# Altium PCB XPCAM_1V1.PCBDOC
Units mil, origin at the board's own origin, x right, y up, seen from the top; angles counter-clockwise.
Board outline 1027.56 x 1106.3 mil, 6 copper layers (Top Layer, Internal Plane 1, Mid-Layer 1, Internal Plane 2, Mid-Layer 2, Bottom Layer); 62 components, 35 nets, 215 pads, 119 vias.
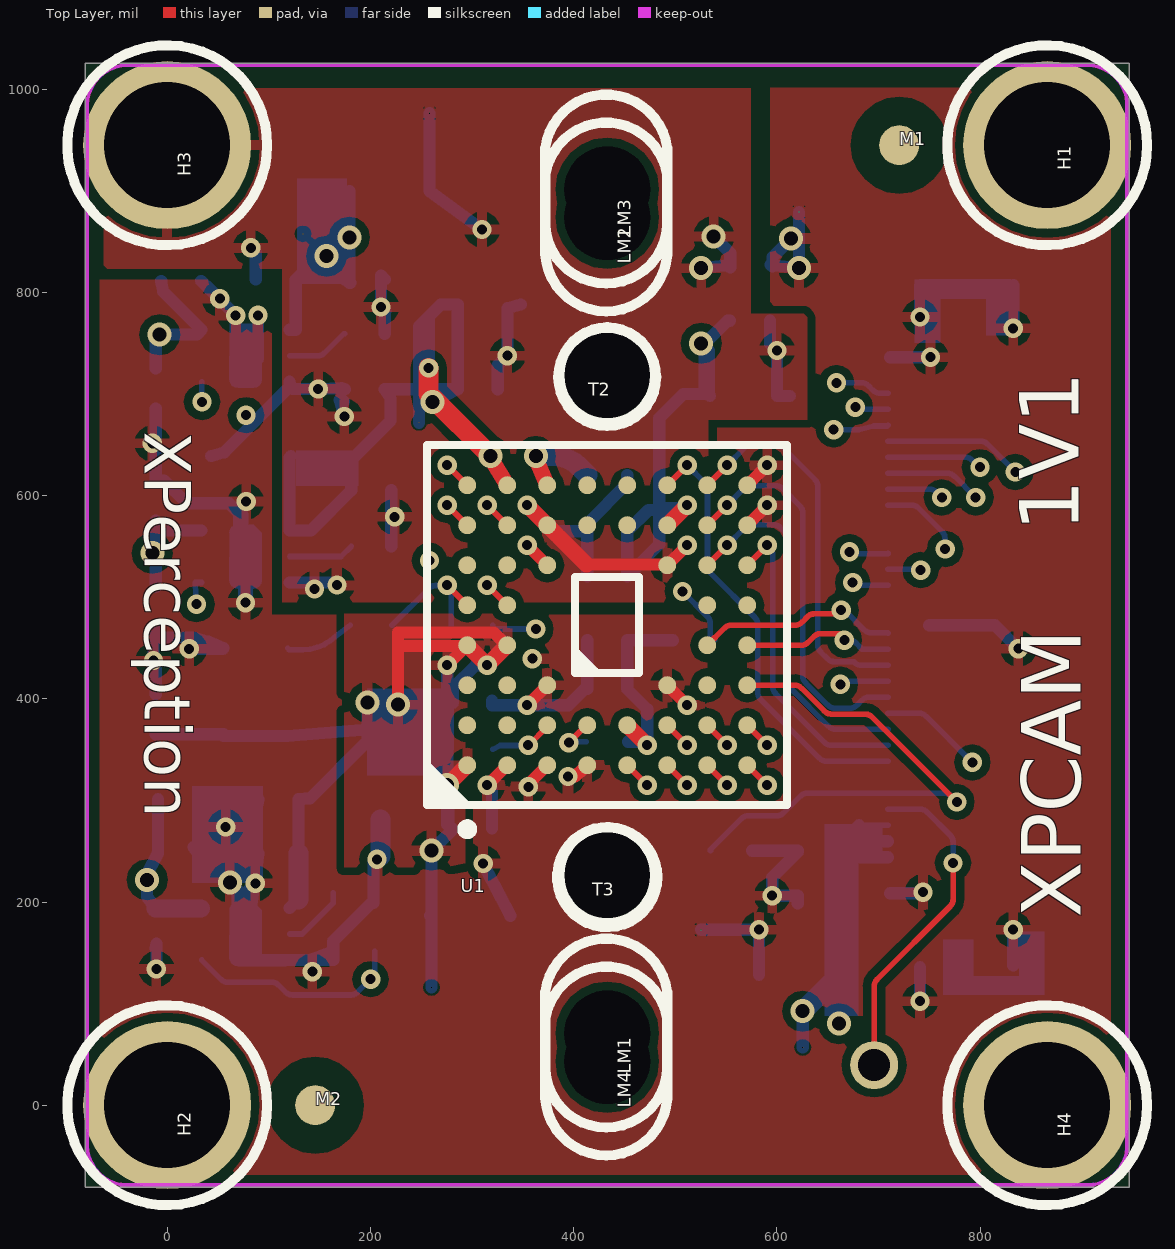
[diagram p0: Top Layer view]
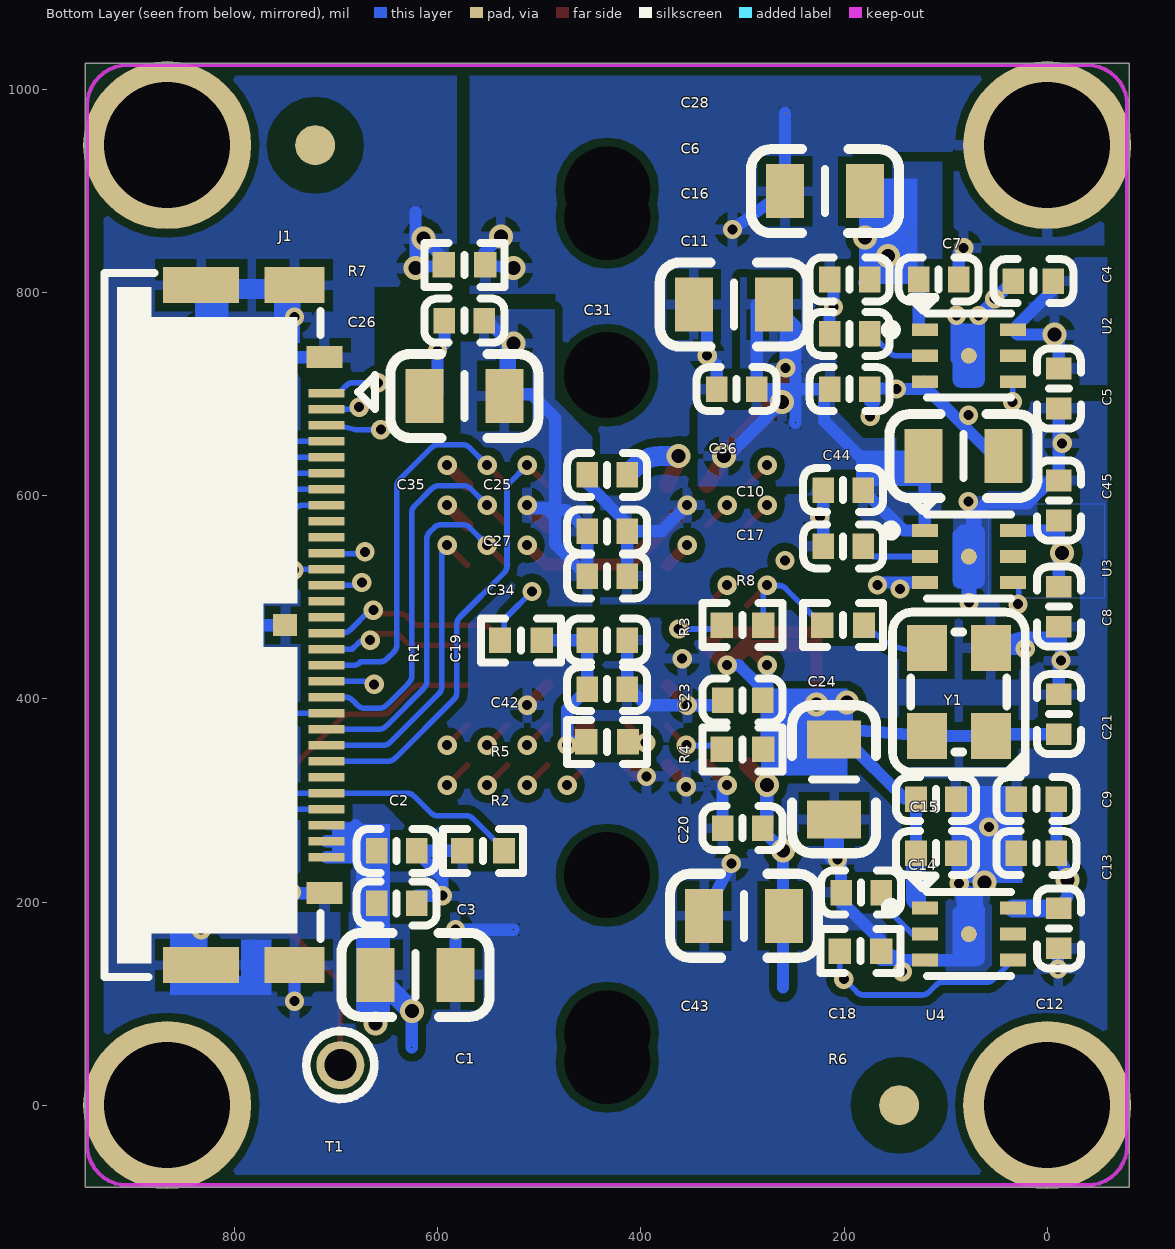
[diagram p1: Bottom Layer view, seen from below]
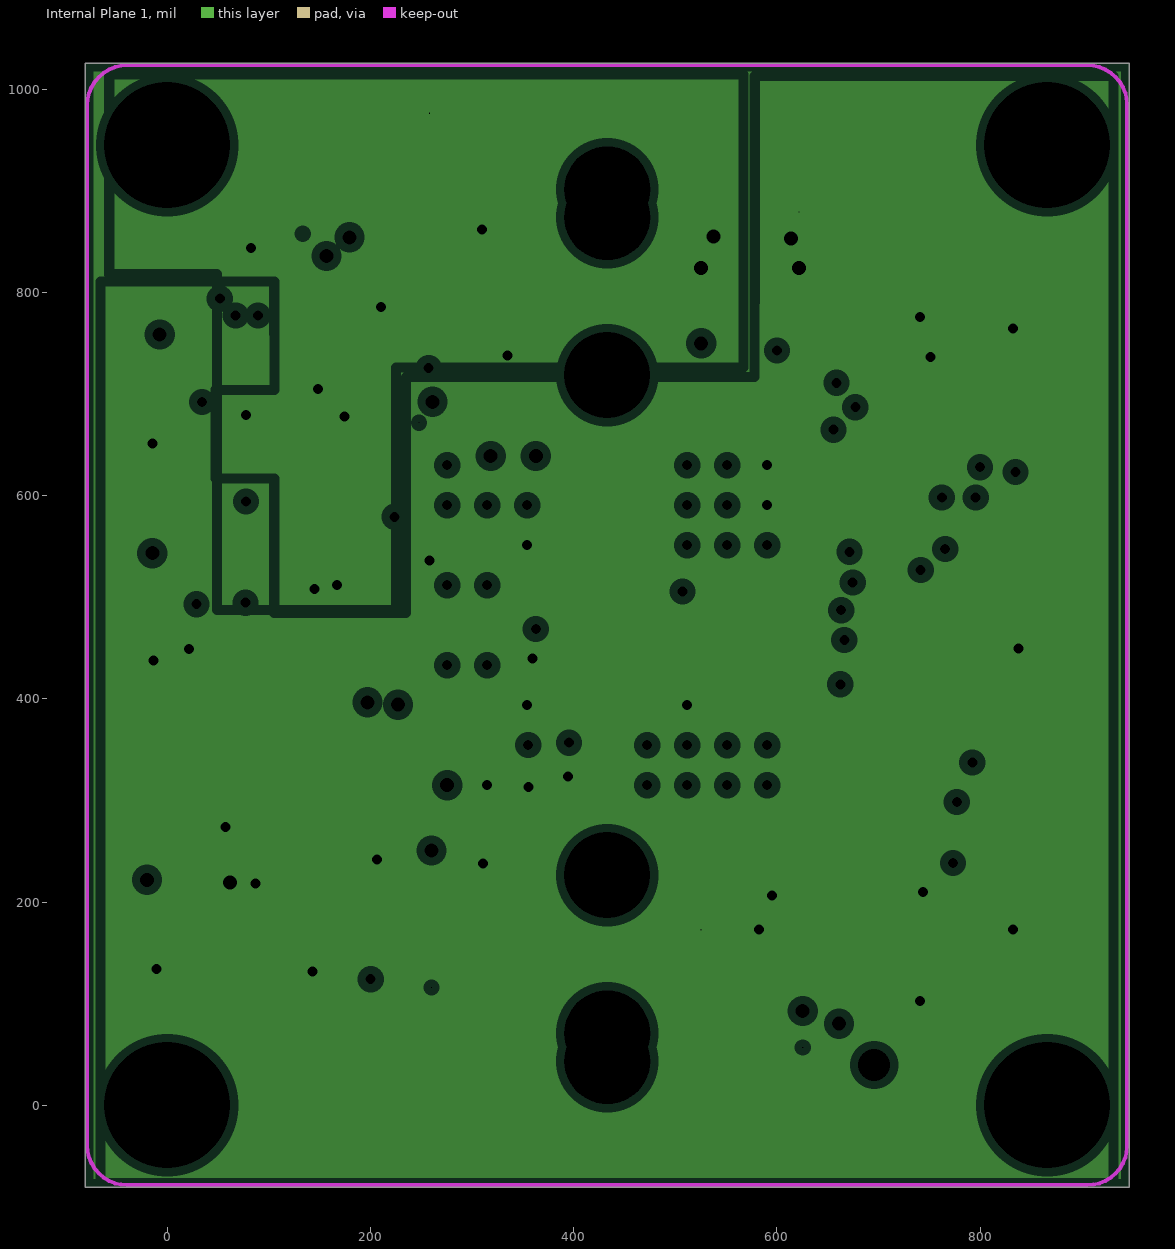
[diagram p2: Internal Plane 1, clearances drawn from the general rule]
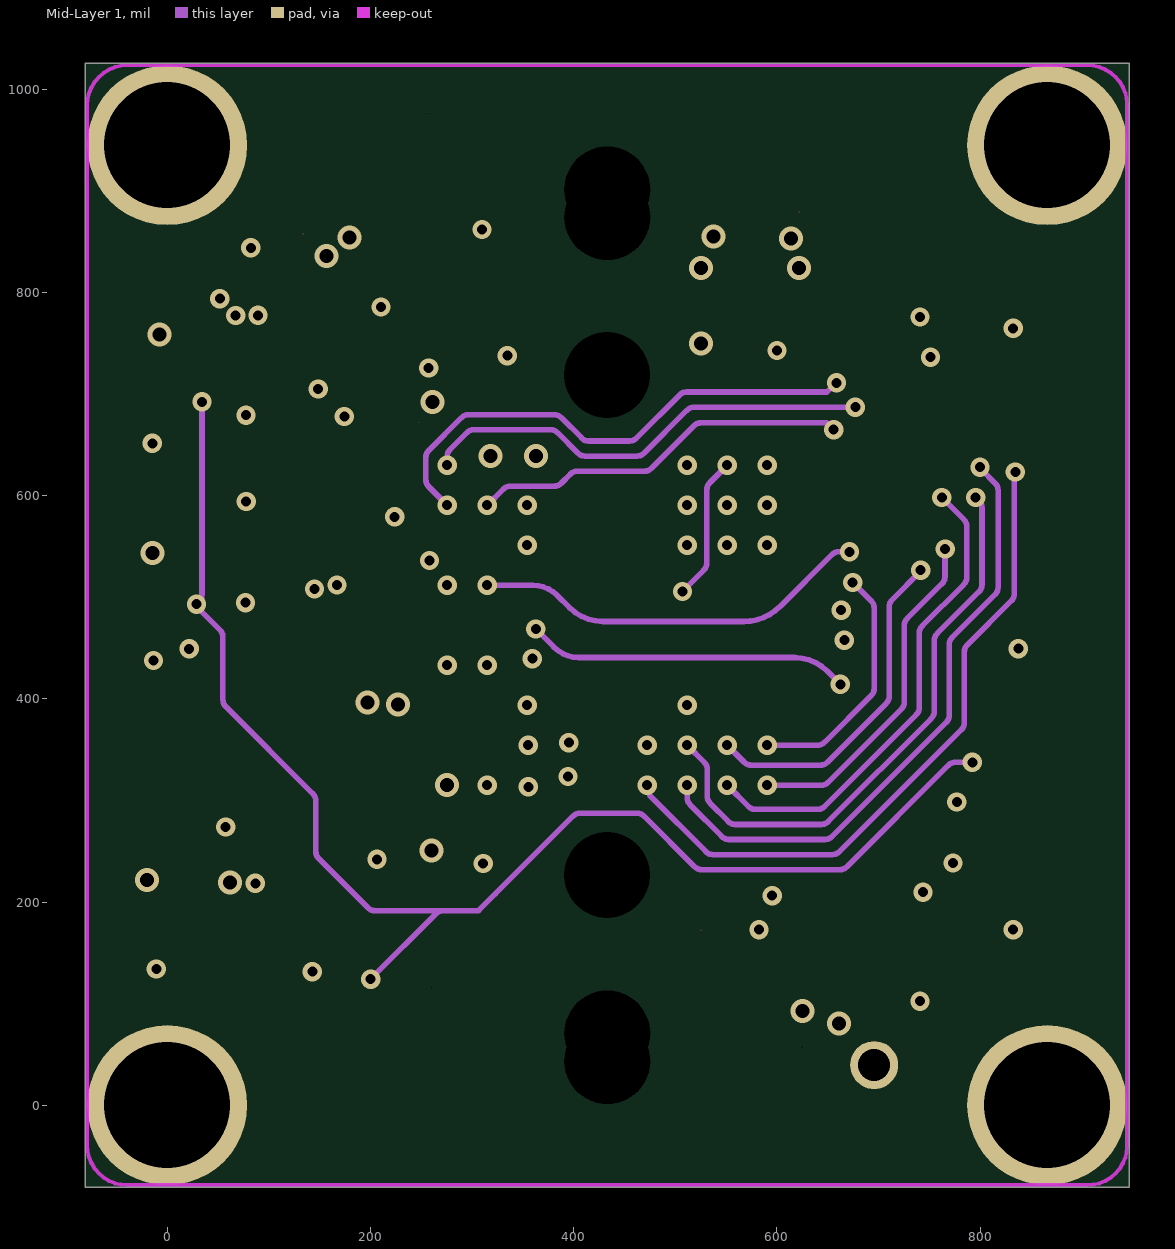
[diagram p3: Mid-Layer 1]
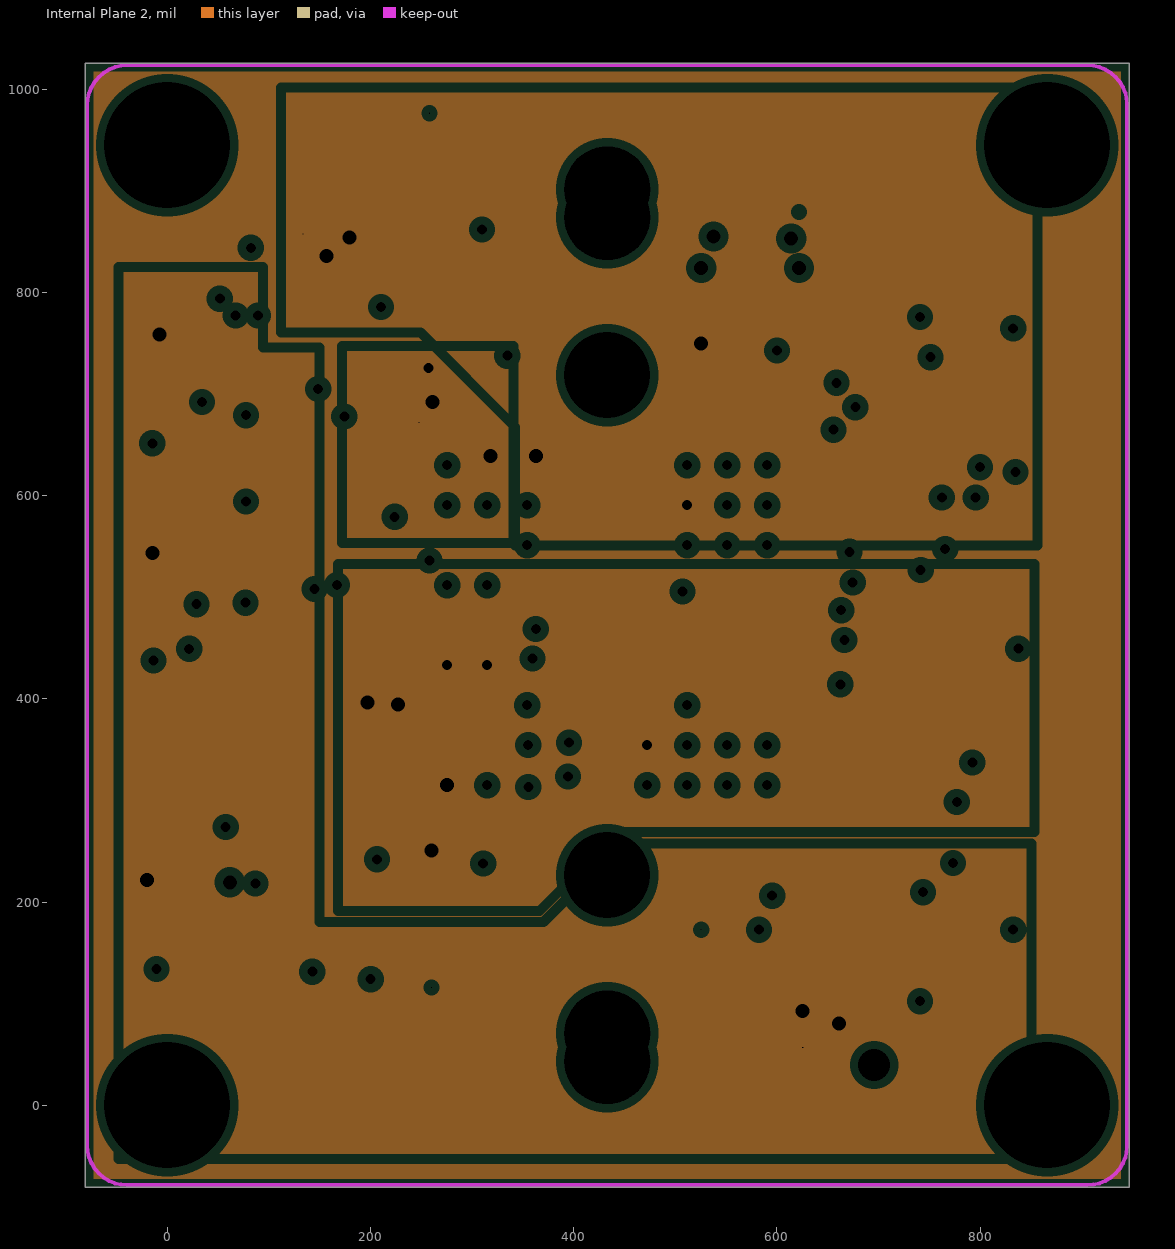
[diagram p4: Internal Plane 2, clearances drawn from the general rule]
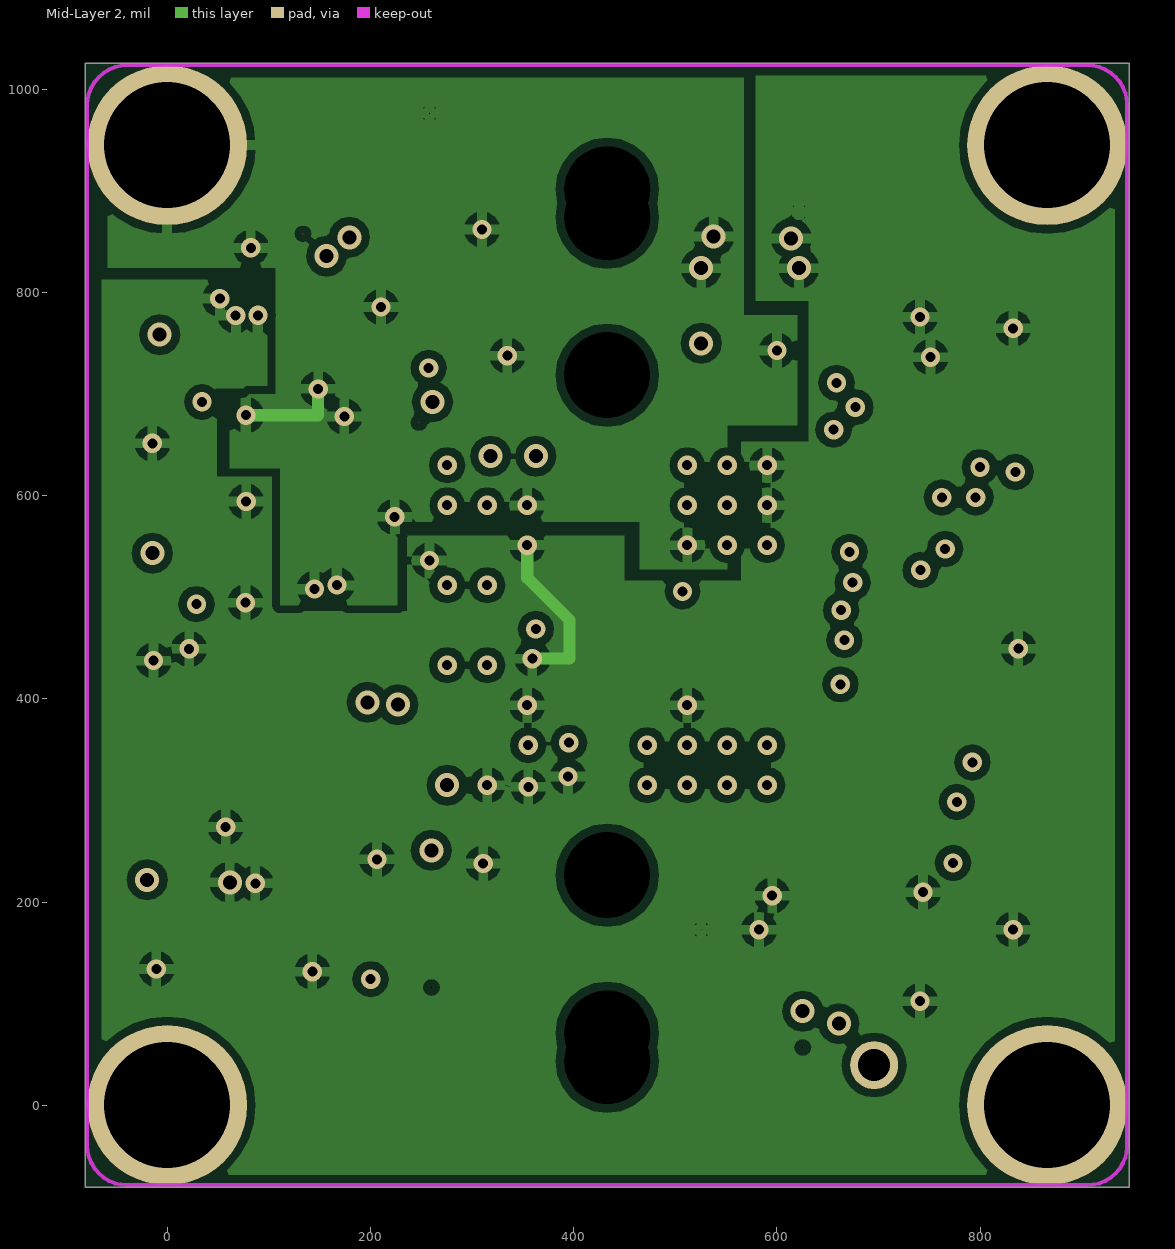
[diagram p5: Mid-Layer 2]

## Layer stack, top to bottom
Top Layer: signal copper 1.4
Dielectric: dielectric 12.6, FR-4, Dk 4.8
Internal Plane 1: plane copper 1.4
Dielectric: dielectric 12.6, FR-4, Dk 4.8
Mid-Layer 1: signal copper 1.4
Dielectric: dielectric 12.6, FR-4, Dk 4.8
Internal Plane 2: plane copper 1.4
Dielectric: dielectric 12.6, FR-4, Dk 4.8
Mid-Layer 2: signal copper 1.4
Dielectric: dielectric 12.6, FR-4, Dk 4.8
Bottom Layer: signal copper 1.4

## Board outline
-80.71,-80.71 946.85,-80.71 946.85,1025.59 -80.71,1025.59

## Design rules (kind name [scope] priority, off if disabled: settings)
Clearance "'Default' PADS rule_9" [All] p1: gap=8
Clearance "'Default' PADS rule_8" [InPolygon vs InPolygon] p2: gap=8
Clearance "'Default' PADS rule_7" [All] p3: gap=5.5
Clearance "'Default' PADS rule_4" [IsVia vs IsVia] p4: gap=6
ComponentClearance "'Default' PADS rule" [All] p1: gap=10 collisioncheckmode=3 verticalgap=10 showdistances=FALSE
PlaneClearance "'Default' PADS rule_3" [All] p1: clearance=8
PlaneConnect "Power Plane Connect Style - pads with no thermal" [(Name='J1-31') Or (Name='J1-32') Or (Name='LM1-1') Or (Name='LM2-1') Or (Name='LM3-1') Or (Name='LM4-1') Or (Name='M1-1') Or (Name='M2-1') Or (Name='T2-1') Or (Name='T3-1')] p1: planeconnectstyle=NoConnect reliefexpansion=20 reliefentries=4 reliefconductorwidth=10 reliefairgap=10 // PAD - No Thermal Connect Rule
PlaneConnect "Power Plane Connect Style - from global settings" [All] p2: planeconnectstyle=Relief reliefexpansion=20 reliefentries=2 reliefconductorwidth=11.81 reliefairgap=10
PolygonConnect [All] p1: connectstyle=Relief reliefconductorwidth=10 reliefentries=4 polygonreliefangle="90 Angle"
RoutingVias [All] p1: holewidth=28 width=50 viastyle="Through Hole" minholewidth=28 minwidth=50 maxholewidth=28 maxwidth=50
SMDToCorner "'Default' PADS rule_5" [All] p1: distance=60000
SMDToPlane "'Default' PADS rule_6" [All] p1: distance=60000
SilkscreenOverComponentPads [All] p1: minsilkscreentomaskgap=10
SolderMaskExpansion [All] p1: expansion=4
Width "'Default' PADS rule_2" [All] p1: maxlimit=250 minlimit=5 preferedwidth=5.6
24 further rules are at their usual default settings.

## Components (designator, comment, footprint, x,y, rotation, side; value= is the part's Value field where it differs from the comment)
C1 "0805C" 0805C 621.77,128.34 r0 bottom
C2 "0402C_L" 0402C_L 640.27,250.44 r0 bottom
C3 "0402C_L" 0402C_L 640.27,198.64 r0 bottom
C4 "0402C_L" 0402C_L 13.76,811.13 r180 bottom
C5 "0402C_L" 0402C_L -11.39,705.49 r90 bottom
C6 "0402C_L" 0402C_L 194.49,812.75 r0 bottom
C7 "0402C_L" 0402C_L 106.83,812.75 r0 bottom
C8 "0402C_L" 0402C_L -11.39,490.66 r90 bottom
C9 "0402C_L" 0402C_L 10.7,301.18 r180 bottom
C10 "0402C_L" 0402C_L 200.79,605.35 r0 bottom
C11 "0402C_L" 0402C_L 194.49,704.72 r0 bottom
C12 "0402C_L" 0402C_L -11.39,174.01 r90 bottom
C13 "0402C_L" 0402C_L 10.7,248.03 r180 bottom
C14 "0402C_L" 0402C_L 109.51,248.03 r180 bottom
C15 "0402C_L" 0402C_L 109.51,301.18 r0 bottom
C16 "0402C_L" 0402C_L 194.49,759.28 r180 bottom
C17 "0402C_L" 0402C_L 200.79,550.11 r180 bottom
C18 "0402C_L" 0402C_L 183.18,209.32 r180 bottom
C19 "0402C_L" 0402C_L 433.07,457.64 r0 bottom
C20 "0402C_L" 0402C_L 299.87,272.64 r180 bottom
C21 "0402C_L" 0402C_L -11.39,384.92 r270 bottom
C23 "0402C_L" 0402C_L 299.87,398.44 r180 bottom
C24 "0805C" 0805C 209.76,320.84 r90 bottom
C25 "0402C_L" 0402C_L 433.07,620.44 r180 bottom
C26 "0402C_L" 0402C_L 573.67,772.14 r180 bottom
C27 "0402C_L" 0402C_L 433.07,564.94 r0 bottom
C28 "0805C" 0805C 218.7,899.71 r180 bottom
C31 "0805C" 0805C 308.54,788.07 r180 bottom
C34 "0402C_L" 0402C_L 433.07,520.54 r0 bottom
C35 "0805C" 0805C 573.67,698.14 r180 bottom
C36 "0402C_L" 0402C_L 305.65,704.72 r180 bottom
C42 "0402C_L" 0402C_L 433.07,409.54 r0 bottom
C43 "0805C" 0805C 298.3,186.46 r180 bottom
C44 "0805C" 0805C 82.38,638.88 r0 bottom
C45 "0402C_L" 0402C_L -11.39,595.26 r90 bottom
H1 "PAD_M3_D350_450" PAD_M3_D350_450 866.14,944.88 r90 top
H2 "PAD_M3_D350_450" PAD_M3_D350_450 0,0 r90 top
H3 "PAD_M3_D350_450" PAD_M3_D350_450 0,944.88 r90 top
H4 "PAD_M3_D350_450" PAD_M3_D350_450 866.14,0 r90 top
J1 "HSA30_P40L196W42H10_20525" HSA30_P40L196W42H10_20525 767.72,472.44 r270 bottom
LM1 "PAD_M3_D350_450A" PAD_M3_D350_450A 433.07,70.87 r90 top
LM2 "PAD_M3_D350_450A" PAD_M3_D350_450A 433.07,874.02 r90 top
LM3 "PAD_M3_D350_450A" PAD_M3_D350_450A 433.07,901.57 r90 top
LM4 "PAD_M3_D350_450A" PAD_M3_D350_450A 433.07,43.31 r90 top
M1 "PAD_MARK_D1-2" PAD_MARK_D1-2 720.47,944.88 r0 top
M2 "PAD_MARK_D1-2" PAD_MARK_D1-2 145.67,0 r0 top
R1 "0402R_L" 0402R_L 518.17,457.64 r180 bottom
R2 "0402R_L" 0402R_L 555.17,250.44 r0 bottom
R3 "0402R_L" 0402R_L 299.87,472.44 r0 bottom
R4 "0402R_L" 0402R_L 299.87,350.34 r180 bottom
R5 "0402R_L" 0402R_L 433.07,357.74 r0 bottom
R6 "0402R_L" 0402R_L 183.85,151.69 r0 bottom
R7 "0402R_L" 0402R_L 573.44,827.17 r180 bottom
R8 "0402R_L" 0402R_L 200.79,472.44 r180 bottom
T1 "PAD_TP_D1.2" PAD_TP_D1.2 695.77,39.54 r270 bottom
T2 "PAD_D2-D1.2" PAD_D2-D1.2 433.07,718.5 r270 top
T3 "PAD_D2-D1.2" PAD_D2-D1.2 433.07,226.38 r270 top
U1 "IBGA52_8X8_P100L90W90H90R" IBGA52_8X8_P100L90W90H90R 433.07,472.44 r90 top
U2 "SON6_P65L21W21H8_DRV" SON6_P65L21W21H8_DRV 77.18,737.7 r180 bottom
U3 "SON6_P65L21W21H8_DRV" SON6_P65L21W21H8_DRV 77.18,540.07 r180 bottom
U4 "SON6_P65L21W21H8_DRV" SON6_P65L21W21H8_DRV 77.18,168.51 r180 bottom
Y1 "XTAL_3225" XTAL_3225 87,406.59 r90 bottom

## Footprints (in the part's own frame and the unit in brackets; to place one, negate y for a bottom-side part, rotate by r counter-clockwise, add the part's x,y. Pads: shape width x height; smd on the part's side, far side on the other; paste and mask are expansions set on the pad)
0402C_L [mm]
  rect 0.54x0.64 smd: 1(-0.5,0) 2(0.5,0)
  silkscreen extent -1,-0.55 1,0.55
0402R_L [mm]
  rect 0.56x0.64 smd: 1(-0.52,0) 2(0.52,0)
  silkscreen extent -1,-0.55 1,0.55
0805C [mm]
  rect 0.95x1.35 smd: 1(-1,0) 2(1,0)
  silkscreen extent -1.85,-1.05 1.85,1.05
HSA30_P40L196W42H10_20525 [mm]
  rect 0.21x0.9 smd: 1(-5.8,1.48) 2(-5.4,1.48) 3(-5,1.48) 4(-4.6,1.48) 5(-4.2,1.48) 6(-3.8,1.48) 7(-3.4,1.48) 8(-3,1.48) 9(-2.6,1.48) 10(-2.2,1.48) 11(-1.8,1.48) 12(-1.4,1.48) 13(-1,1.48) 14(-0.6,1.48) 15(-0.2,1.48) 16(0.2,1.48) 17(0.6,1.48) 18(1,1.48) 19(1.4,1.48) 20(1.8,1.48) 21(2.2,1.48) 22(2.6,1.48) 23(3,1.48) 24(3.4,1.48) 25(3.8,1.48) 26(4.2,1.48) 27(4.6,1.48) 28(5,1.48) 29(5.4,1.48) 30(5.8,1.48)
  round 0 all layers, no hole: 31(-7.45,0) 32(7.45,0)
  rect 0.9x1.5 smd: 33(-8.5,0.68) 34(8.5,0.68)
  rect 0.9x1.9 smd: 35(8.5,-1.65) 36(-8.5,-1.65)
  rect 0.55x0.9 smd: 37(-6.7,1.43) 38(6.7,1.43)
  rect 0.55x0.6 smd: 39(0,0.45)
  silkscreen extent -8.8,-4.07 8.8,2.7
IBGA52_8X8_P100L90W90H90R [mm]
  round 0.45 smd: A1(-3.5,3.5) A2(-2.5,3.5) A3(-1.5,3.5) A4(-0.5,3.5) A5(0.5,3.5) A6(1.5,3.5) A7(2.5,3.5) A8(3.5,3.5) B1(-3.5,2.5) B2(-2.5,2.5) B3(-1.5,2.5) B4(-0.5,2.5) B5(0.5,2.5) B6(1.5,2.5) B7(2.5,2.5) B8(3.5,2.5) C1(-3.5,1.5) C2(-2.5,1.5) C3(-1.5,1.5) C6(1.5,1.5) C7(2.5,1.5) C8(3.5,1.5) D1(-3.5,0.5) D2(-2.5,0.5) D7(2.5,0.5) D8(3.5,0.5) E1(-3.5,-0.5) E2(-2.5,-0.5) E7(2.5,-0.5) E8(3.5,-0.5) F1(-3.5,-1.5) F2(-2.5,-1.5) F3(-1.5,-1.5) F6(1.5,-1.5) F7(2.5,-1.5) F8(3.5,-1.5) G1(-3.5,-2.5) G2(-2.5,-2.5) G3(-1.5,-2.5) G4(-0.5,-2.5) G5(0.5,-2.5) G6(1.5,-2.5) G7(2.5,-2.5) G8(3.5,-2.5) H1(-3.5,-3.5) H2(-2.5,-3.5) H3(-1.5,-3.5) H4(-0.5,-3.5) H5(0.5,-3.5) H6(1.5,-3.5) H7(2.5,-3.5) H8(3.5,-3.5)
  silkscreen extent -5.22,-4.5 4.5,4.5
PAD_D2-D1.2 [mm]
  round 2.1 hole 2.15 unplated: 1(0,0)
  silkscreen extent -1.2,-1.2 1.2,1.2
PAD_M3_D350_450 [mm]
  round 4.2 / inner round 4 / far side round 4.2 hole 3.15: 1(0,0)
  silkscreen extent -2.5,-2.5 2.5,2.5
PAD_M3_D350_450A [mm]
  round 2.1 hole 2.15 unplated: 1(0,0)
  silkscreen extent -2.35,-1.5 2.36,1.55
PAD_MARK_D1-2 [mm]
  round 1 / inner round 0 / far side round 1 all layers, no hole mask+0.5: 1(0,0)
  Top Layer pour cut-out: 1.21,0 1.169,0.313 1.048,0.605 0.856,0.856 0.605,1.048 0.313,1.169 0,1.21 -0.313,1.169 -0.605,1.048 -0.856,0.856 -1.048,0.605 -1.169,0.313 -1.21,0 -1.169,-0.313 -1.048,-0.605 -0.856,-0.856 -0.605,-1.048 -0.313,-1.169 0,-1.21 0.313,-1.169 0.605,-1.048 0.856,-0.856 1.048,-0.605 1.169,-0.313 1.21,0
  Top Layer pour cut-out: 1.009,0 0.974,0.261 0.873,0.504 0.713,0.713 0.504,0.873 0.261,0.974 0,1.009 -0.261,0.974 -0.504,0.873 -0.713,0.713 -0.873,0.504 -0.974,0.261 -1.009,0 -0.974,-0.261 -0.873,-0.504 -0.713,-0.713 -0.504,-0.873 -0.261,-0.974 0,-1.009 0.261,-0.974 0.504,-0.873 0.713,-0.713 0.873,-0.504 0.974,-0.261 1.009,0
  Bottom Layer pour cut-out: 1.21,0 1.169,0.313 1.048,0.605 0.856,0.856 0.605,1.048 0.313,1.169 0,1.21 -0.313,1.169 -0.605,1.048 -0.856,0.856 -1.048,0.605 -1.169,0.313 -1.21,0 -1.169,-0.313 -1.048,-0.605 -0.856,-0.856 -0.605,-1.048 -0.313,-1.169 0,-1.21 0.313,-1.169 0.605,-1.048 0.856,-0.856 1.048,-0.605 1.169,-0.313 1.21,0
  Bottom Layer pour cut-out: 1.009,0 0.974,0.261 0.873,0.504 0.713,0.713 0.504,0.873 0.261,0.974 0,1.009 -0.261,0.974 -0.504,0.873 -0.713,0.713 -0.873,0.504 -0.974,0.261 -1.009,0 -0.974,-0.261 -0.873,-0.504 -0.713,-0.713 -0.504,-0.873 -0.261,-0.974 0,-1.009 0.261,-0.974 0.504,-0.873 0.713,-0.713 0.873,-0.504 0.974,-0.261 1.009,0
PAD_TP_D1.2 [mm]
  round 1.2 hole 0.8: 1(0,0)
  silkscreen extent -0.85,-0.85 0.85,0.85
SON6_P65L21W21H8_DRV [mm]
  rect 0.65x0.32 smd: 1(-1.1,0.65) 2(-1.1,0) 3(-1.1,-0.65) 4(1.1,-0.65) 5(1.1,0) 6(1.1,0.65)
  round 0.4 smd: 7(0,0)
  Top Layer region: -0.4,0.6 -0.2,0.8 0.2,0.804 0.278,0.788 0.344,0.744 0.388,0.678 0.404,0.6 0.4,0.6 0.404,-0.6 0.388,-0.678 0.344,-0.744 0.278,-0.788 0.2,-0.804 0.2,-0.8 -0.2,-0.804 -0.278,-0.788 -0.344,-0.744 -0.388,-0.678 -0.404,-0.6 -0.4,-0.6 -0.4,0.6
  silkscreen extent -2.08,-1.05 1.05,1.45
XTAL_3225 [mm]
  rect 1.15x1 smd: 1(-1.1,-0.8) 2(1.1,-0.8) 3(1.1,0.8) 4(-1.1,0.8)
  silkscreen extent -2,-1.66 2,1.66

## Via types
v1: diameter 19, hole 9.84, Top Layer to Bottom Layer, 92 vias
v2: diameter 23.62, hole 13.78, Top Layer to Bottom Layer, 20 vias
v3: diameter 0, hole 0, Top Layer to Bottom Layer, 7 vias

## Nets (pads, with @x,y where several pads share a name; then routed paths per layer and width w, separated by ;. In a path a pad name is that pad's centre, name@x,y a point inside that pad or via, vN(x,y) a via of type N, cw(c..) or ccw(c..) an arc to the next point about the centre after c; other vN are vias at no path point)
5V0: C1.2 C2.2 C3.2 C4.2 C5.2 C8.2 C9.2 C12.2 C13.2 C45.1 J1.28 J1.29 J1.30 U2.6 U3.6 U4.6 | length 837.7
  Bottom Layer w5.5: C1.2@659.96,127.16 C1.2 C1.2@661.14,132.04 ; C2.2@659.96,246.74 C2.2 ; 680.97,275.59 J1.28
  Bottom Layer w12: C12.2 -19.85,205.1 v2(-19.85,221.89) -18.57,230.45 C13.2 C9.2 ; C8.2 C45.1@-11.39,565.66 ; C45.1 C45.1@-11.39,565.66 ; C5.2 -11.39,754.47 v2(-7.37,758.5) 29.22,758.5 U2.6 33.69,763.29 -3.92,800.9 C4.2 ; U4.6@33.46,193.69 U4.6 ; U3.6 C45.1@-11.39,565.66 ; v3(625.47,56.89) v2(625.47,92.67) ; C1.2@659.96,133.23 C1.2@661.14,132.04 ; C2.2@659.96,246.74 662.6,244.09 J1.30 ; 680.97,275.59 659.96,254.58 C2.2 669.36,259.84 J1.29
  Bottom Layer w17.72: C12.2 U4.6@33.46,193.69
  Bottom Layer w20: v2(625.47,92.67) C1.2@659.96,127.16 ; C1.2@659.96,133.23 C3.2 659.96,246.74 C2.2 ; v2(661.14,80.24) C1.2
  other v2: -14.65,543.39
ADDR_CTL: J1.20 U1.G7 | length 385
  Top Layer w6: U1.G7 v1(551.18,590.55)
  Bottom Layer w5.5: v1(551.18,590.55) 567.46,606.83 cw(c574.27,600.03) 574.27,609.65 598.97,609.65 cw(c598.97,600.03) 605.78,606.83 622.65,589.96 cw(c615.85,583.15) 625.47,583.15 625.47,422.57 ccw(c635.1,422.57) 628.29,415.77 650.51,393.55 ccw(c657.31,400.36) 657.31,390.73 671.84,390.73 ccw(c671.84,400.36) 678.65,393.55 683.85,398.76 cw(c690.66,391.95) 690.66,401.57 J1.20
AGND: C6.2 C7.1 C10.2 C11.1 C16.1 C17.1 C25.1 C26.1 C27.1 C28.1 C31.1 C34.1 C35.1 C36.1 C44.1 R7.2 U1.C7 U1.F6 U2.3 U3.3 | length 1286.2
  Top Layer w12: 412.57,532.31 491.31,532.31 U1.F6 v1(511.81,551.18)
  Top Layer w15.75: v1(354.33,590.55) U1.C7 412.57,532.31
  Mid-Layer 2 w12: v1(77.59,679.15) 148.52,679.15 v1(148.52,705.06)
  Bottom Layer w5.5: C27.1@407.17,564.94 C27.1
  Bottom Layer w12: C44.1 56.04,642.76 U2.3@121.1,707.82 ; v1(82.23,843.91) 87.14,839 C7.1 ; U2.3 U2.3@121.1,707.82 ; v1(144.85,508.09) 142.3,511.72 142.3,512.05 139.87,514.48 U3.3 164.46,514.48 v1(167.1,511.96) ; C11.1@174.13,692.75 169.76,693.99 v1(174.28,677.82) ; C11.1 171.75,705.74 v1(148.52,705.06) 123.17,705.06 U2.3@121.1,707.82 ; C16.1 214.18,780.6 214.94,781.36 v1(210.35,785.66) 210.35,816.54 C6.2 ; C17.1 v1@220.47,579.19 ; C10.2 v1@220.47,579.19 ; v1(223.81,579.19) v1@220.47,579.19 ; v3(258.07,976.39) C28.1 v1(309.82,861.92) ; C36.1 325.34,728.37 v1(334.76,737.8) 334.76,784.51 C31.1 ; v1(354.33,590.55) 379.94,564.94 C27.1@407.17,564.94 ; C34.1 C27.1 413.39,572.35 452.76,612.11 C25.1 ; v2(525.57,823.94) R7.2 554.07,824.82 554.07,838.74 v2(537.76,855.05) ; C26.1 593.36,749.51 v1(600.06,742.8) 600.06,698.14 C35.1
CAM_SCL: J1.17 U1.H4 | length 152.3
  Top Layer w5.5: U1.H4 624,452.76 ccw(c624,462.38) 630.8,455.58 636.67,461.44 cw(c643.47,454.63) 643.47,464.26 666.4,464.26 v1(666.4,457.81)
  Bottom Layer w5.5: v1(666.4,457.81) 671.12,457.81 cw(c671.12,448.19) 677.93,455 684.11,448.82 J1.17
CAM_SDA: J1.16 U1.G4 | length 202.2
  Top Layer w5.5: U1.G4 548.36,469.62 cw(c555.17,462.82) 555.17,472.44 617.78,472.44 ccw(c617.78,482.07) 624.59,475.26 630.12,480.79 cw(c636.93,473.99) 636.93,483.61 663.3,483.61 v1(663.3,487.3)
  Bottom Layer w5.5: v1(663.3,487.3) 666.58,487.3 686.02,467.86 ccw(c692.83,474.67) 692.83,465.04 708.97,465.04 J1.16
CAMPWR_EN: J1.21 R6.2 U2.4 U3.4 U4.4 | length 1872.3
  Mid-Layer 1 w5.5: v1(34.26,692.27) 34.26,502.66 ; v1(200.18,124.11) 264.8,188.73 ; v1(792.37,337.45) 792.37,337.73 775.94,337.73 ccw(c775.94,328.1) 769.14,334.91 668.99,234.76 cw(c662.18,241.57) 662.18,231.94 525.86,231.94 cw(c525.86,241.57) 519.05,234.76 469.31,284.5 ccw(c462.5,277.7) 462.5,287.32 406.13,287.32 ccw(c406.13,277.7) 399.32,284.5 322.6,207.79 306.37,191.55 ; v1@31.44,495.85 ccw(c24.63,502.66) 34.26,502.66 ; v1@31.44,495.85 ccw(c24.63,502.66) 34.26,502.66 ; v1@31.44,495.85 ccw(c24.63,502.66) 34.26,502.66 ; v1@31.44,495.85 ccw(c24.63,502.66) 34.26,502.66 ; v1@31.44,495.85 v1(28.73,493.15) 28.73,490.88 52.01,467.6 ; 52.01,467.6 cw(c45.21,460.79) 54.83,460.79 ; 52.01,467.6 cw(c45.21,460.79) 54.83,460.79 ; 52.01,467.6 cw(c45.21,460.79) 54.83,460.79 ; 54.83,399 ccw(c64.46,399) 57.65,392.19 ; 54.83,399 ccw(c64.46,399) 57.65,392.19 ; 54.83,399 ccw(c64.46,399) 57.65,392.19 ; 54.83,399 54.83,460.79 ; 57.65,392.19 143.51,306.33 ; 143.51,306.33 cw(c136.71,299.52) 146.33,299.52 ; 143.51,306.33 cw(c136.71,299.52) 146.33,299.52 ; 143.51,306.33 cw(c136.71,299.52) 146.33,299.52 ; 146.33,249.56 ccw(c155.96,249.56) 149.15,242.76 ; 146.33,249.56 ccw(c155.96,249.56) 149.15,242.76 ; 146.33,249.56 ccw(c155.96,249.56) 149.15,242.76 ; 146.33,249.56 146.33,299.52 ; 149.15,242.76 197.54,194.37 ; 197.54,194.37 ccw(c204.35,201.18) 204.35,191.55 ; 197.54,194.37 ccw(c204.35,201.18) 204.35,191.55 ; 197.54,194.37 ccw(c204.35,201.18) 204.35,191.55 ; 204.35,191.55 306.37,191.55 ; 264.8,188.73 cw(c271.61,181.93) 271.61,191.55 ; 264.8,188.73 cw(c271.61,181.93) 271.61,191.55 ; 271.61,191.55 306.37,191.55
  Bottom Layer w5.5: v1(28.73,493.15) 27.6,513.81 27.6,514.52 27.64,514.48 U3.4 ; U4.4 52.93,123.86 ccw(c59.74,130.67) 59.74,121.04 102.81,121.04 cw(c102.81,111.42) 109.62,118.22 116.49,111.35 ccw(c123.3,118.15) 123.3,108.53 180.61,108.53 ccw(c180.61,118.15) 187.42,111.35 v1(200.18,124.11) 201.5,125.43 ccw(c194.69,132.24) 204.32,132.24 R6.2 ; U2.4 33.87,692.65 v1(34.26,692.27) ; J1.21 740,385.83 cw(c740,376.2) 746.81,383.01 v1(792.37,337.45)
CLK2: R8.2 Y1.3 | length 69.6
  Bottom Layer w5.5: Y1.3 120.05,448.35 133.53,448.35 ccw(c133.53,494.19) 165.95,461.77 R8.2
CMOS_D0: J1.1 U1.A7 | length 593.3
  Top Layer w6: v1(275.59,590.55) U1.A7
  Mid-Layer 1 w5.5: v1(275.59,590.55) 257.4,608.74 cw(c264.21,615.55) 254.58,615.55 254.58,637.76 cw(c264.21,637.76) 257.4,644.57 289.65,676.82 cw(c296.46,670.02) 296.46,679.64 380.98,679.64 cw(c380.98,670.02) 387.79,676.82 408.05,656.56 ccw(c414.86,663.37) 414.86,653.74 454.98,653.74 ccw(c454.98,663.37) 461.79,656.56 504.45,699.22 cw(c511.26,692.41) 511.26,702.04 649.21,702.04 658.27,711.09 v1(658.67,711.09)
  Bottom Layer w5.5: v1(658.67,711.09) 683.33,711.09 cw(c683.33,701.47) 690.14,708.28 694.8,703.61 ccw(c701.61,710.41) 701.61,700.79 J1.1
CMOS_D1: J1.2 U1.A8 | length 512.6
  Top Layer w6: v1(275.59,629.92) U1.A8
  Mid-Layer 1 w5.5: v1(275.59,629.92) 275.59,638.65 cw(c285.22,638.65) 278.41,645.46 294.97,662.02 cw(c301.78,655.22) 301.78,664.84 377.28,664.84 cw(c377.28,655.22) 384.09,662.02 404.35,641.76 ccw(c411.16,648.57) 411.16,638.94 462.38,638.94 ccw(c462.38,648.57) 469.19,641.76 511.65,684.22 cw(c518.46,677.42) 518.46,687.04 v1(677.27,687.04)
  Bottom Layer w5.5: v1(677.27,687.04) 679.27,685.04 J1.2
CMOS_D2: J1.3 U1.B7 | length 457.3
  Top Layer w6: v1(314.96,590.55) U1.B7
  Mid-Layer 1 w5.5: v1(314.96,590.55) 330.93,606.52 cw(c337.74,599.72) 337.74,609.34 380.98,609.34 ccw(c380.98,618.97) 387.79,612.16 396.95,621.32 cw(c403.76,614.52) 403.76,624.14 469.78,624.14 ccw(c469.78,633.77) 476.59,626.96 518.4,668.77 cw(c525.21,661.97) 525.21,671.59 649.24,671.59 v1(655.89,664.95)
  Bottom Layer w5.5: v1(655.89,664.95) 680.51,664.85 695.26,668.54 708.7,668.54 J1.3
CMOS_D3: J1.4 U1.E1 | length 831.4
  Top Layer w6: U1.E1 v1(472.44,314.96)
  Mid-Layer 1 w5.5: v1(472.44,314.96) 473.77,313.63 473.77,309.93 ccw(c483.4,309.93) 476.59,303.12 530.15,249.56 ccw(c536.96,256.37) 536.96,246.74 654.78,246.74 ccw(c654.78,256.37) 661.59,249.56 781.75,369.72 ccw(c774.95,376.53) 784.57,376.53 784.57,446.25 cw(c794.2,446.25) 787.39,453.06 830.97,496.64 ccw(c824.17,503.45) 833.79,503.45 833.79,622.13 v1(834.8,623.36)
  Bottom Layer w5.5: J1.4 800.63,653.54 cw(c800.63,643.92) 807.44,650.72 v1(834.8,623.36)
CMOS_D4: J1.5 U1.F1 | length 736.8
  Top Layer w6: U1.F1 v1(511.81,314.96)
  Mid-Layer 1 w5.5: v1(511.81,314.96) 511.81,302.53 ccw(c521.44,302.53) 514.63,295.72 545.99,264.36 ccw(c552.8,271.17) 552.8,261.54 647.38,261.54 ccw(c647.38,271.17) 654.19,264.36 766.95,377.12 ccw(c760.15,383.93) 769.77,383.93 769.77,453.65 cw(c779.4,453.65) 772.59,460.46 814.9,502.77 ccw(c808.1,509.58) 817.72,509.58 817.72,605.38 ccw(c808.1,605.38) 814.9,612.19 v1@801.84,625.25 ; v1(799.88,628.02) 800.24,627.36 ccw(c808.65,632.06) v1@801.84,625.25
  Bottom Layer w5.5: J1.5 785.31,637.8 cw(c785.31,628.17) 792.11,634.98 800.9,626.19 v1(799.88,628.02)
CMOS_D5: J1.6 U1.F2 | length 697
  Top Layer w6: U1.F2 v1(511.81,354.33)
  Mid-Layer 1 w5.5: v1(511.81,354.33) 528.66,337.49 cw(c521.85,330.68) 531.48,330.68 531.48,304.02 ccw(c541.1,304.02) 534.29,297.22 552.35,279.16 ccw(c559.16,285.97) 559.16,276.34 643.68,276.34 ccw(c643.68,285.97) 650.49,279.16 752.15,380.82 ccw(c745.35,387.63) 754.97,387.63 754.97,457.35 cw(c764.6,457.35) 757.79,464.16 799.13,505.5 ccw(c792.32,512.3) 801.95,512.3 801.95,587.98 ccw(c792.32,587.98) 799.13,594.79 v1(795.67,598.24)
  Bottom Layer w5.5: J1.6 767.88,622.05 cw(c767.88,612.42) 774.68,619.23 v1(795.67,598.24)
CMOS_D6: J1.7 U1.G1 | length 560.4
  Top Layer w6: U1.G1 v1(551.18,314.96)
  Mid-Layer 1 w5.5: v1(551.18,314.96) 572.18,293.96 ccw(c578.99,300.77) 578.99,291.14 639.98,291.14 ccw(c639.98,300.77) 646.79,293.96 737.35,384.52 ccw(c730.55,391.33) 740.17,391.33 740.17,464.75 cw(c749.8,464.75) 742.99,471.56 784.12,512.69 ccw(c777.32,519.5) 786.94,519.5 786.94,569.68 ccw(c777.32,569.68) 784.12,576.49 v1(762.37,598.24)
  Bottom Layer w5.5: J1.7 750.33,606.3 cw(c750.33,596.67) 757.13,603.48 v1(762.37,598.24)
CMOS_D7: J1.8 U1.H1 | length 447.2
  Top Layer w6: U1.H1 v1(590.55,314.96)
  Mid-Layer 1 w5.5: v1(590.55,314.96) 643.68,314.96 ccw(c643.68,324.59) 650.49,317.78 722.55,389.84 ccw(c715.75,396.65) 725.37,396.65 725.37,472.15 cw(c735,472.15) 728.19,478.96 762.65,513.42 ccw(c755.85,520.23) 765.47,520.23 765.47,547.06 v1(765.73,547.57)
  Bottom Layer w5.5: J1.8 732.77,590.55 cw(c732.77,580.93) 739.58,587.73 762.65,564.66 cw(c755.85,557.85) 765.47,557.85 765.47,547.06 v1(765.73,547.57)
CMOS_HD: J1.13 U1.H2 | length 305.9
  Top Layer w6: U1.H2 v1(590.55,354.33)
  Mid-Layer 1 w5.5: v1(590.55,354.33) 639.98,354.33 ccw(c639.98,363.96) 646.79,357.15 692.95,403.31 ccw(c686.15,410.12) 695.77,410.12 695.77,489.39 ccw(c686.15,489.39) 692.95,496.19 v1(674.68,514.46)
  Bottom Layer w5.5: v1(674.68,514.46) 675.67,514.02 ccw(c679.65,522.78) 679.57,513.15 680.97,513.14 682.3,511.81 J1.13
CMOS_OE: J1.23 U1.H6 | length 307.7
  Top Layer w6: U1.H6 v1(590.55,551.18)
  Bottom Layer w5.5: v1(590.55,551.18) 593.05,548.68 cw(c586.25,541.87) 595.87,541.87 595.87,412.08 ccw(c605.5,412.08) 598.69,405.27 646.81,357.15 ccw(c653.62,363.96) 653.62,354.33 J1.23
CMOS_PCLK: J1.11 U1.B5 | length 460.3
  Top Layer w6: v1(314.96,511.81) U1.B5
  Mid-Layer 1 w5.5: v1(314.96,511.81) 359.75,511.81 cw(c359.75,477.72) 383.86,501.83 395.8,489.88 ccw(c428.98,523.06) 428.98,476.14 567.46,476.14 ccw(c567.46,526.86) 603.33,491 654.24,541.91 cw(c661.04,535.1) 661.04,544.73 v1(671.58,544.73)
  Bottom Layer w5.5: v1(671.58,544.73) 675.73,543.28 ccw(c678.9,552.37) 678.9,542.74 709.45,542.74 J1.11
CMOS_RST: J1.18 R1.1 U1.G8 | length 628.2
  Top Layer w6: U1.G8 v1(551.18,629.92)
  Mid-Layer 1 w5.5: v1(507.07,505.74) 528.33,527 ccw(c521.53,533.81) 531.15,533.81 531.15,605.9 cw(c540.78,605.9) 533.97,612.71 v1(551.18,629.92)
  Bottom Layer w5.5: v1(507.07,505.74) 531.5,481.31 cw(c524.7,474.5) 534.32,474.5 534.32,457.64 R1.1 ; v1(551.18,629.92) 568.47,647.21 ; J1.18 683.2,433.07 ; 568.47,647.21 cw(c575.27,640.4) 575.27,650.02 ; 568.47,647.21 cw(c575.27,640.4) 575.27,650.02 ; 575.27,650.02 599.3,650.02 ; 599.3,650.02 cw(c599.3,640.4) 606.11,647.21 ; 599.3,650.02 cw(c599.3,640.4) 606.11,647.21 ; 606.11,647.21 637.45,615.86 ; 637.45,615.86 cw(c630.65,609.05) 640.27,609.05 ; 637.45,615.86 cw(c630.65,609.05) 640.27,609.05 ; 640.27,453.04 ccw(c649.9,453.04) 643.09,446.23 ; 640.27,453.04 ccw(c649.9,453.04) 643.09,446.23 ; 640.27,453.04 640.27,609.05 ; 643.09,446.23 649.9,439.42 ; 649.9,439.42 ccw(c656.71,446.23) 656.71,436.6 ; 649.9,439.42 ccw(c656.71,446.23) 656.71,436.6 ; 656.71,436.6 675.68,436.6 676.4,435.89 ; 676.4,435.89 ccw(c683.2,442.7) 683.2,433.07 ; 676.4,435.89 ccw(c683.2,442.7) 683.2,433.07
CMOS_VD: J1.12 U1.G2 | length 394.6
  Top Layer w6: U1.G2 v1(551.18,354.33)
  Mid-Layer 1 w5.5: v1(551.18,354.33) 567.92,337.59 ccw(c574.73,344.4) 574.73,334.77 642.92,334.77 ccw(c642.92,344.4) 649.72,337.59 707.75,395.62 ccw(c700.95,402.43) 710.57,402.43 710.57,490.65 cw(c720.2,490.65) 713.39,497.46 742.12,526.19 v1(741.6,526.7)
  Bottom Layer w5.5: J1.12 739.68,527.56 ccw(c739.68,537.18) 740.66,527.61 741.5,527.7 v1(741.6,526.7)
DGND: C1.1 C2.1 C3.1 C4.1 C5.1 C8.1 C9.1 C12.1 C13.1 C14.2 C15.1 C18.1 C19.1 C20.1 C21.1 C23.1 C24.1 C42.1 C43.1 C45.2 J1.33 J1.34 J1.35 J1.36 J1.37 J1.38 J1.39 R2.2 R6.1 R7.1 U1.B1 U1.C1 U1.C3 U1.C6 U1.D1 U1.F3 U1.H7 U1.H8 U2.7 U3.7 U4.3 U4.7 Y1.2 | length 2781.5
  Top Layer w12: v1(314.96,314.96) U1.B1 ; v1(354.33,393.7) U1.C3 ; v1(354.33,551.18) U1.C6 ; v1(355.37,313.34) 355.37,316 U1.C1 ; v1(394.38,323.58) 401.36,323.58 v1@403.03,325.25 ; v1@403.07,325.25 U1.D1 ; U1.F3 v1(511.81,393.7) ; U1.H7 v1(590.55,590.55) ; U1.H8 v1(590.55,629.92)
  Mid-Layer 2 w12: v1(354.33,551.18) 354.33,519.1 396.06,477.37 396.06,439.6 v1(359.39,439.6)
  Bottom Layer w5.5: J1.34@740.94,135.74 J1.34 ; J1.36@828.97,807.09 J1.36
  Bottom Layer w12: C12.1 -10.68,159.05 v1(-10.68,134.07) ; C21.1 -11.39,435.54 v1(-13.49,437.65) -13.49,460.31 ; C8.1 -13.49,460.31 ; C5.1 -11.39,654.71 v1(-14.65,651.45) -11.39,648.19 C45.2 -3.25,614.94 19.16,592.53 60.67,592.53 72.35,580.85 72.35,588.95 v1(77.62,594.22) ; v1(21.57,449.18) 54.79,449.18 Y1.2 40.44,456.28 25.74,460.31 -13.49,460.31 ; C9.1 34.97,296.45 v1(57.5,273.91) ; v1(51.73,793.81) 33.3,811.13 C4.1 C4.1 v1(67.41,777.23) 67.41,738.8 69.74,738.8 U2.7 89.24,734.46 v1(89.24,777.4) ; U3.7@76.95,545.35 72.35,552.93 U3.7 ; v1(86.64,218.36) 79.65,211.37 79.65,181.36 ; C15.1 89.37,297.48 81.29,297.48 57.72,273.91 v1(57.5,273.91) ; v1(142.79,131.4) 142.79,143.93 R6.1 R6.1@163.37,153.8 ; v1@209.76,245.32 v1(206.48,242.04) 202.86,238.42 C18.1 202.86,199.26 202.94,199.19 202.94,201.19 163.37,161.63 R6.1@163.37,153.8 ; v1(310.97,238.01) C43.1 ; v1(314.96,314.96) 319.56,310.37 C20.1 ; C23.1 319.56,393.7 v1(354.33,393.7) 394.89,393.7 410.73,409.54 C42.1 C19.1 ; v3(525.48,172.74) v1(582.4,172.74) C1.1 ; R2.2 C2.1 620.59,249.26 595.4,224.07 v1(595.4,206.28) 620.59,206.28 C3.1 ; v2(614.11,853.02) 595.87,834.78 595.87,825.67 R7.1 v2(621.77,823.94) v3(621.77,879.14) ; J1.38 742.79,208.66 v1(743.87,209.74) ; J1.37 v1(751.27,736.22) ; v1(740.94,102.44) J1.34@740.94,135.74 ; v1(740.94,775.84) J1.33 J1.36@828.97,807.09 ; J1.39 814.63,472.44 v1(837.7,449.37) ; J1.35 v1(832.68,172.74) ; v1(832.68,764.74) J1.36 ; v1(57.5,273.91) 31.94,248.35 C13.1 25.91,254.1 61.62,218.39 v2(61.62,219.47) 69.35,211.74 69.35,173.81 73.29,169.87 U4.7 ; v1(57.5,273.91) 58.85,273.91 82.45,250.32 82.94,250.32 C14.2 81.03,182.74 79.65,181.36 ; U4.7 79.65,173.95 79.65,181.36 ; U4.7 77.18,142.63 115.62,142.63 U4.3 163.37,142.92 R6.1@163.37,153.8
  Bottom Layer w15: 72.35,552.93 72.35,580.85 ; v1(76.95,494.62) U3.7@76.95,545.35
  Bottom Layer w19.68: v1@209.76,245.32 C24.1
  other v1: 258.17,536.1
EXPOSURE: J1.26 R2.1 U1.H3 | length 521.1
  Top Layer w5.5: U1.H3 617.42,413.39 cw(c617.42,403.76) 624.23,410.57 646.94,387.85 ccw(c653.75,394.66) 653.75,385.03 686.69,385.03 cw(c686.69,375.41) 693.5,382.21 v1(777.17,298.54)
  Bottom Layer w5.5: R2.1 534.7,251.59 565.18,282.07 cw(c571.99,275.26) 571.99,284.89 599.9,284.89 ccw(c599.9,294.51) 606.7,287.71 623.26,304.27 cw(c630.07,297.46) 630.07,307.09 J1.26 764.64,307.09 cw(c764.64,297.46) 771.44,304.27 v1(777.17,298.54)
LEDOUT0: J1.22 U1.G6 | length 362.6
  Top Layer w6: U1.G6 v1(551.18,551.18)
  Bottom Layer w5.5: v1(551.18,551.18) 568.63,568.63 cw(c575.44,561.83) 575.44,571.45 596.47,571.45 cw(c596.47,561.83) 603.28,568.63 607.85,564.06 cw(c601.05,557.25) 610.67,557.25 610.67,417.2 ccw(c620.3,417.2) 613.49,410.39 650.98,372.9 ccw(c657.79,379.7) 657.79,370.08 J1.22
MCLK27M: R3.1 R8.1 U1.A5 | length 139
  Top Layer w6: v1(275.59,511.81) U1.A5
  Bottom Layer w5.5: R8.1 257.53,508.71 cw(c264.34,501.91) 264.34,511.53 275.31,511.53 v1(275.59,511.81) 279.4,508 R3.1
MCLK27M': J1.19 R3.2 | length 415.7
  Mid-Layer 1 w5.5: v1(362.77,468.74) 380.69,450.83 ccw(c405.12,475.26) 405.12,440.71 617.01,440.71 cw(c617.01,394.44) 649.73,427.15 v1(662.52,414.36)
  Bottom Layer w5.5: R3.2 320.34,468.74 v1(362.77,468.74) ; v1(662.52,414.36) 663.04,417.98 665.37,417.98 665.37,417.32 J1.19
NETC16_2: C16.2 U2.2 | length 62.9
  Bottom Layer w5.5: U2.2 148.05,737.7 ccw(c148.05,747.32) 154.85,740.52 173.62,759.28 C16.2
NETC17_2: C17.2 U3.2 | length 64.8
  Bottom Layer w5.5: U3.2 171.06,540.07 C17.2
NETC18_2: C18.2 U4.2 | length 66
  Bottom Layer w5.5: U4.2 132.91,168.51 163.24,198.85 163.24,209.32 C18.2
NETR4_1: R4.1 U1.C2 | length 64.1
  Top Layer w5.5: v1(355.25,354.46) 355.52,354.19 374.02,372.69 U1.C2
  Bottom Layer w5.5: R4.1 327.74,354.04 355.25,354.04 v1(355.25,354.46)
NETR5_1: R5.1 U1.D2 | length 43
  Top Layer w5.5: v1(395.31,356.82) 396.07,357.74 396.62,358.26 412.38,374.02 U1.D2
  Bottom Layer w5.5: v1(395.31,356.82) 396.07,357.74 R5.1
STANDBY: J1.24 U1.F8 | length 436.8
  Top Layer w6: U1.F8 v1(511.81,629.92)
  Bottom Layer w5.5: v1(511.81,629.92) 528.95,612.79 cw(c522.14,605.98) 531.77,605.98 531.77,530.81 ccw(c541.39,530.81) 534.58,524.01 578.25,480.34 cw(c571.45,473.54) 581.07,473.54 581.07,406.44 ccw(c590.7,406.44) 583.89,399.64 642.13,341.4 ccw(c648.93,348.21) 648.93,338.58 J1.24
TEST1: J1.27 T1.1 | length 329.7
  Top Layer w5.5: T1.1 695.77,116.95 cw(c705.4,116.95) 698.59,123.76 770.65,195.82 ccw(c763.85,202.63) 773.47,202.63 v1(773.47,238.45)
  Bottom Layer w5.5: J1.27 741.07,291.34 cw(c741.07,281.71) 747.87,288.52 770.65,265.74 cw(c763.85,258.94) 773.47,258.94 v1(773.47,238.45)
VAA3.3V: C6.1 C7.2 C25.2 C26.2 C27.2 C28.2 C34.2 C35.2 U1.C8 U1.F7 U2.1 | length 940.5
  Top Layer w12: v2@362.77,636.88 v2(362.77,638.94)
  Top Layer w15.75: v2@362.77,636.88 U1.C8 ; U1.F7 v1(511.81,590.55)
  Bottom Layer w5.5: C35.2@525.57,700 v2@525.57,746.24
  Bottom Layer w12: U2.1 126.51,763.29 C7.2 148.11,834.35 v2@155.37,834.35 ; v3(133.5,857.71) C28.2 v2(179.32,854.25) 179.32,809.14 v2(156.78,835.76) v2@155.37,834.35 ; C6.1 180.13,809.58 v2@155.37,834.35 ; v1(511.81,590.55) 508.77,587.51 484.32,587.51 ; v2@525.57,746.24 551.47,772.14 C26.2 ; v2(525.57,749.94) 532.97,742.54 532.97,699.47 C35.2 532.44,700 525.57,700 507.82,700 484.32,676.51 484.32,587.51 ; 484.32,578.9 484.32,587.51 ; 484.32,578.9 491.37,585.95 473.77,585.95 C27.2 C34.2 484.32,552.11 484.32,578.9
  Bottom Layer w20: v2(362.77,638.94) 380.39,638.94 cw(c380.39,603.94) 405.14,628.69 C25.2
VAA_PIX3.3V: C10.1 C11.2 C31.2 C36.2 C44.2 U1.B8 U3.1 | length 884.7
  Top Layer w12: v2@318.37,636.72 v2(318.37,638.94)
  Top Layer w15.75: v2@318.37,636.72 U1.B8
  Top Layer w19.68: v1(257.38,725.68) 257.38,699.93 v2(318.37,638.94)
  Bottom Layer w12: C44.2 120.48,637.62 U3.1 141.41,565.66 C10.1 181.1,634.98 219.82,673.69 219.82,695.74 C11.2 C36.2 ; v3(247.68,671.81) 247.68,766.58 C31.2 ; v1(257.38,725.68) 257.38,776.28 C31.2 ; v2(318.37,638.94) 314.53,638.94 v2(261.08,692.39) C36.2 ; C31.2 285.97,788.07 C36.2
VDD3.3V: C14.1 C15.2 C19.2 C20.2 C21.2 C23.2 C24.2 C42.2 C43.2 R1.2 R4.2 R5.2 U1.A1 U1.A4 U1.B4 U1.E2 U4.1 Y1.1 Y1.4 | length 1704.3
  Top Layer w12: v2(227.1,394.23) 227.1,439.7 ; v1(275.59,433.07) U1.A4 ; U1.A4@296.1,451.93 227.1,451.93 227.1,439.7 ; U1.B4 333.85,452.76 321.42,465.19 227.1,465.19 227.1,439.7
  Top Layer w15.75: v2(275.59,314.96) U1.A1 ; U1.A4@296.1,451.93 v1(314.96,433.07) U1.B4 ; U1.E2 v1(472.44,354.33)
  Bottom Layer w5.5: v2(275.59,314.96) 280.19,310.37 C20.2 ; R4.2 279.4,393.95 C23.2 275.59,398.44 v1@275.59,431.68 ; v1@275.59,431.68 274.76,432.51 v1(275.59,433.07) v1@275.59,431.68
  Bottom Layer w12: C21.2 55.31,365.23 Y1.1 Y1.4 C24.2@197.05,369.67 ; U4.1 129.19,202.81 ; C14.1 C15.2 140.66,302.2 C24.2@197.05,358.59 ; v2(197.05,396.54) C24.2@197.05,369.67 ; v2(227.1,394.23) 227.1,364.11 213.66,364.11 C24.2 ; v3(260.05,115.78) C43.2@260.05,186.46 ; v1@275.59,431.68 275.59,276.34 276.49,276.34 C20.2 280.19,270.6 v2(260.06,250.77) C43.2@260.06,186.46 ; v1(314.96,433.07) 303.57,433.07 281.37,410.87 281.37,395.93 C23.2 276.62,398.44 276.62,400.04 240.67,364.1 236.79,360.21 C24.2 ; R5.2 469.03,357.74 v1(472.44,354.33) 472.44,389.86 C42.2 C19.2 R1.2 ; C24.2@197.05,358.59 208.14,358.59 C24.2 ; C24.2@197.05,358.59 C24.2@197.05,369.67 ; C43.2@260.05,186.46 C43.2 C43.2@260.06,186.46
  Bottom Layer w20: 129.19,202.81 C14.1
pads on no net: H1.1 H2.1 H3.1 H4.1 J1.9 J1.10 J1.14 J1.15 J1.25 J1.31 J1.32 LM1.1 LM2.1 LM3.1 LM4.1 M1.1 M2.1 T2.1 T3.1 U1.A2 U1.A3 U1.A6 U1.B2 U1.B3 U1.B6 U1.D7 U1.D8 U1.E7 U1.E8 U1.G3 U1.G5 U1.H5 U2.5 U3.5 U4.5

## Polygon pours and split planes (outlines as drawn)
5V0 on Bottom Layer "Bottom Layer-5V0 3" (solid, remove dead copper, pour order 1012): 740.17,305.94 662.47,305.94 627.32,270.79 627.32,83.94 692.07,83.94 692.07,239.34 740.17,239.34
VAA3.3V on Bottom Layer "Bottom Layer-VAA3.3V 1" (solid, remove dead copper, pour order 1011): 577.37,783.24 484.87,783.24 484.87,695.16 447.87,658.16 447.87,490.94 577.37,490.94
AGND on Bottom Layer "Bottom Layer-No Net" (solid, remove dead copper, pour order 1009): 100.89,559.52 173.13,559.52 215.6,601.99 347.34,601.99 347.34,691.88 344.46,691.8 308.82,691.8 308.82,818.22 191.68,818.22 191.68,938.29 92.11,938.29 92.11,846.53 -56.28,846.53 -56.28,1016.39 568.5,1016.39 568.5,798.7 483.57,798.7 483.57,700.1 440.61,657.14 440.61,493.14 100.89,493.14
VAA3.3V on Bottom Layer "Bottom Layer-VAA3.3V" (solid, remove dead copper, pour order 1008): 103.57,928.86 103.57,745.69 186.78,745.69 186.78,928.86
5V0 on Bottom Layer "Bottom Layer-5V0 1" (solid, remove dead copper, pour order 1005): 57.34,591.98 -56.2,591.98 -56.2,498.94 57.34,498.94
5V0 on Bottom Layer "Bottom Layer-5V0" (solid, remove dead copper, pour order 1004): 18.19,709.28 -58.92,709.28 -58.92,834.48 18.19,834.48
VAA_PIX3.3V on Bottom Layer "Bottom Layer-VAA_PIX3.3V" (solid, remove dead copper, pour order 1002): 104.14,563.66 104.14,656.7 181,656.7 207.87,683.57 207.87,815.03 302.35,815.03 302.35,688.48 343.95,688.48 343.95,609.31 215.09,609.31 169.44,563.66
DGND on Bottom Layer "Bottom Layer-DGND" (solid, remove dead copper, pour order 1000): 581.07,1027.44 581.07,805.44 662.47,805.44 662.47,698.14 729.07,698.14 729.07,228.24 695.77,228.24 695.77,80.24 614.37,80.24 614.37,550.14 458.97,550.14 458.97,479.84 266.57,479.84 266.57,487.28 92.5,487.28 92.5,604.31 18.67,604.31 18.67,692.95 -58.92,692.95 -58.92,-78.71 928.87,-78.71 928.87,1027.44
DGND on Top Layer "Top Layer-DGND" (solid, remove dead copper, pour order 1015): 593.45,1001.54 593.45,666.78 541.53,666.78 541.53,482.88 102.64,482.88 102.64,812.54 -66.43,812.54 -66.43,-78.86 928.87,-78.86 928.87,1001.54
AGND on Top Layer "Top Layer-AGND" (solid, remove dead copper, pour order 1014): -62.63,1000.97 574.19,1000.97 574.19,778.97 629.92,778.97 629.92,674.87 532.46,674.87 532.46,495.01 113.32,495.01 113.32,823.43 -62.63,823.43
VDD3.3V on Top Layer "Top Layer-VDD3.3V" (solid, remove dead copper, pour order 1013): 333.98,483.78 174.31,483.78 174.31,234.29 293.16,234.29 293.16,364.94 333.98,364.94
DGND on Mid-Layer 2 "Mid-Layer 2-DGND" (solid, remove dead copper, pour order 1017): -64.46,812.36 106.47,812.36 106.65,705.68 48.87,705.83 48.87,618.52 106.47,618.52 106.47,486.18 236.08,486.18 236.08,560.69 449.73,560.69 449.73,516.09 564.99,516.09 564.99,653.15 631.44,653.15 631.44,791.67 579.43,791.67 579.43,1014.62 932.59,1014.62 932.59,-75.01 -64.46,-75.01
AGND on Mid-Layer 2 "Mid-Layer 2-AGND" (solid, remove dead copper, pour order 1016): 567.35,1011.45 567.35,777.47 620,777.47 620,669.25 551.27,669.25 551.27,527.4 464.99,527.4 464.99,574.2 226.62,574.2 226.62,492.3 111.09,492.3 111.09,626.84 61.37,626.84 61.37,699.96 106.7,699.96 106.7,824.26 -58.55,824.26 -58.55,1011.45
DGND on Internal Plane 1 (split plane): 926.38,-71.54 -60.47,-71.54 -60.47,805.64 43.81,805.64 43.81,707.3 43.6,706.99 43.05,706.17 43.05,706.16 43.04,706.15 42.85,705.18 42.66,704.22 42.66,704.21 42.66,704.2 42.66,616.9 43.04,614.94 43.81,613.8 43.81,487.41 44.2,485.46 45.3,483.81 46.96,482.7 48.91,482.31 100.84,482.31 101.75,480.95 103.4,479.85 105.35,479.46 234.97,479.46 236.92,479.85 238.57,480.95 239.68,482.61 240.07,484.56 240.07,711.83 578.1,711.83 580.05,712.22 581.71,713.32 582.81,714.98 583.2,716.93 583.2,788.96 583.42,790.04 583.42,1007.89 926.38,1007.89
AGND on Internal Plane 1 (split plane): 562.1,780.97 562.12,780.87 562.12,731.1 225,731.1 223.05,730.71 221.39,729.6 220.29,727.95 219.9,726 219.9,492.51 110.45,492.51 110.45,616.9 110.06,618.85 108.96,620.5 107.3,621.61 105.35,621.99 54.01,621.99 54.01,699.09 105.53,698.96 105.54,698.96 105.55,698.96 106.52,699.15 107.48,699.34 107.49,699.35 107.5,699.35 108.32,699.9 109.13,700.44 109.14,700.45 109.15,700.46 109.7,701.28 110.24,702.09 110.25,702.1 110.25,702.11 110.44,703.08 110.64,704.04 110.63,704.05 110.64,704.06 110.45,810.74 110.25,811.73 110.06,812.69 109.5,813.53 108.96,814.34 108.95,814.34 108.95,814.35 108.13,814.89 107.3,815.44 107.3,815.45 107.29,815.45 106.33,815.64 105.35,815.83 54.01,815.83 54.01,817.86 53.62,819.81 52.51,821.46 50.86,822.57 48.91,822.95 -51.93,822.95 -51.93,1009.32 562.1,1009.32
AGND on Internal Plane 1 (split plane): 100.25,492.51 54.01,492.51 54.01,611.8 100.25,611.8
AGND on Internal Plane 1 (split plane): 100.43,709.17 54.01,709.29 54.01,805.64 100.26,805.64
no net on Internal Plane 1 (split plane): -61.73,1016.37 -62.12,1014.42 -62.12,817.86 -61.73,815.91 -61.69,815.83 -65.57,815.83 -67.52,815.44 -69.17,814.34 -70.28,812.69 -70.67,810.74 -70.67,-72.64 -72.64,-72.64 -72.64,1017.52 -60.96,1017.52
no net on Internal Plane 1 (split plane): 938.78,-72.64 936.57,-72.64 936.57,1012.99 936.18,1014.94 935.08,1016.6 933.7,1017.52 938.78,1017.52
no net on Internal Plane 1 (split plane): 574.71,1016.6 573.61,1014.94 573.22,1012.99 573.22,791.12 573.01,790.04 573.01,722.02 570.27,722.02 570.82,722.39 571.93,724.05 572.31,726 572.31,780.97 572.29,781.07 572.29,1014.42 571.91,1016.37 571.14,1017.52 576.1,1017.52
no net on Internal Plane 1 (split plane): 231.36,720.53 230.26,718.88 230.09,718.06 230.09,720.9 231.92,720.9
5V0 on Internal Plane 2 (split plane): 938.78,-72.64 -72.64,-72.64 -72.64,1017.52 938.78,1017.52
5V0 on Internal Plane 2 (split plane): 89.31,746.05 89.69,744.13 90.78,742.5 92.41,741.41 94.33,741.03 144.69,741.03 144.69,180.14 145.07,178.22 146.16,176.59 147.79,175.51 149.71,175.12 370.17,175.12 372.09,175.51 373.72,176.59 449.95,252.82 845.88,252.82 845.88,-47.94 -42.91,-47.94 -42.91,820.15 89.31,820.15
VAA3.3V on Internal Plane 2 (split plane): 851.57,555.9 347.44,555.9 347.44,667.66 347.06,669.58 346.7,670.12 345.97,671.21 345.59,671.59 345.59,747.21 345.21,749.13 344.12,750.75 342.49,751.84 340.57,752.22 264.95,752.22 252.81,764.36 251.19,765.45 249.27,765.83 117,765.83 117,996.52 851.57,996.52
VDD3.3V on Internal Plane 2 (split plane): 848.72,273.96 444.17,273.96 442.25,273.58 440.62,272.49 364.39,196.26 173.24,196.26 173.24,527.72 848.72,527.72
VAA_PIX3.3V on Internal Plane 2 (split plane): 335.55,667.43 335.55,558.63 176.83,558.63 176.83,742.19 260.8,742.19
VAA_PIX3.3V on Internal Plane 2 (split plane): 335.55,681.62 274.99,742.19 335.55,742.19

## Keep-outs
Keep-Out Layer:
  lines w3.94: -78.74,-39.37 ccw(c-39.37,-39.37) -39.37,-78.74 905.51,-78.74 ccw(c905.51,-39.37) 944.88,-39.37 944.88,984.25 ccw(c905.51,984.25) 905.51,1023.62 -39.37,1023.62 ccw(c-39.37,984.25) -78.74,984.25 -78.74,-39.37

## Other copper
Bottom Layer:
  region net DGND: 24.43,313.95 24.43,219.04 94.2,219.04 94.2,313.95 24.43,313.95
  region net DGND: 735.88,750.39 735.88,812.43 835.65,812.43 835.65,758 805.98,758 805.98,794.01 760.82,794.01 760.82,750.39 735.88,750.39
  region net VDD3.3V: 270.68,409.88 196.81,409.88 196.81,324.72 270.68,324.72 270.68,409.88
  region net VAA_PIX3.3V: 188.16,644.19 127.06,644.19 127.06,609.55 188.16,609.55 188.16,644.19
  region net DGND: 863.37,170.57 863.37,108.53 763.6,108.53 763.6,162.95 793.27,162.95 793.27,126.94 838.43,126.94 838.43,170.57 863.37,170.57
  region net 5V0: 703.9,276.34 647.15,276.34 647.15,88.25 680.31,88.25 680.31,240.64 703.9,240.64 703.9,276.34
  region net VAA3.3V: 128.16,911.89 128.16,808.63 176.85,808.63 176.85,911.89 128.16,911.89
Internal Plane 1 (plane layer: these items are gaps in the copper):
  lines w10: 567.22,780.97 567.22,726 225,726 225,487.41 48.91,487.41 48.91,817.86 -57.02,817.86 -57.02,1014.42 567.2,1014.42 567.2,780.97 ; 567.2,780.97 567.22,780.97 ; -65.57,-76.63 -65.57,810.74 105.35,810.74 105.54,704.05 47.75,704.2 47.75,616.9 105.35,616.9 105.35,484.56 234.97,484.56 234.97,716.93 578.1,716.93 578.1,790.04 578.32,790.04 578.32,1012.99 931.47,1012.99 931.47,-76.63 -65.57,-76.63
Internal Plane 2 (plane layer: these items are gaps in the copper):
  lines w9.84: -47.93,-52.96 -47.93,825.17 94.33,825.17 94.33,746.05 149.71,746.05 149.71,180.14 370.17,180.14 447.87,257.84 850.89,257.84 850.89,-52.96 -47.93,-52.96 ; 111.99,760.81 249.27,760.81 342.42,667.66 342.42,550.89 856.59,550.89 856.59,1001.54 111.99,1001.54 111.99,760.81 ; 168.22,191.24 366.47,191.24 444.17,268.94 853.74,268.94 853.74,532.74 168.22,532.74 168.22,191.24 ; 171.81,553.61 171.81,747.21 340.57,747.21 340.57,553.61 171.81,553.61

## Silkscreen, mask and mechanical layers (free items; w line width, h text height)
Top Overlay:
  circle w9.84: c433.07,224.54 r49.36
  circle w9.84: c433.07,716.64 r48.24
  pour cut-out: 151.87,757.34 714.27,757.34 714.27,187.54 151.87,187.54 151.87,757.34
  pour cut-out: 366.3,102.44 366.48,104.22 370.23,116.6 376.33,128.02 384.54,138.02 394.55,146.23 405.96,152.33 418.34,156.08 431.22,157.35 444.1,156.08 456.48,152.33 467.9,146.23 477.9,138.02 486.11,128.02 492.21,116.6 495.96,104.22 496.13,102.55 495.97,102.44 495.98,20.75 495.27,13.56 491.55,1.31 485.52,-9.98 477.4,-19.87 467.5,-28 456.21,-34.03 443.96,-37.75 431.22,-39 418.48,-37.75 406.23,-34.03 394.94,-28 385.05,-19.87 376.92,-9.98 370.89,1.31 367.17,13.56 366.47,20.75 366.47,102.44
  pour cut-out: 366.13,924.54 367.48,934.82 367.59,935.07 367.86,935 370.23,942.81 376.33,954.22 384.54,964.22 394.55,972.43 405.96,978.53 418.34,982.29 431.22,983.56 444.1,982.29 456.48,978.53 467.9,972.43 477.9,964.22 486.11,954.22 492.21,942.81 494.58,935 494.85,935.07 494.96,934.82 496.31,924.54 495.97,924.54 496.31,850.31 495.61,844.96 495.65,844.96 495.27,841.05 491.55,828.8 485.52,817.51 477.4,807.61 467.5,799.49 456.21,793.46 443.96,789.74 431.22,788.49 418.48,789.74 406.23,793.46 394.94,799.49 385.05,807.61 376.92,817.51 370.89,828.8 367.17,841.05 366.79,844.96 366.83,844.96 366.13,850.31 366.47,850.31 366.47,924.54
  text "XPerception" at -37.44,662.82 h78.74 r270
  text "1V1" at 916.52,564.67 h100 r90
  text "XPCAM" at 918.09,184.35 h100 r90
Drill Drawing:
  lines w1: 944.88,1003.94 944.91,1003.94 ; -78.74,1003.94 -78.71,1003.94 ; 908.4,1023.72 908.43,1023.72 ; 908.95,-78.82 908.98,-78.82
  lines w10: -78.74,1053.94 -78.74,1182.03 ; 248.53,1132.03 -78.74,1132.03 ; 617.62,1132.03 944.88,1132.03 ; 944.88,1053.94 944.88,1182.03 ; 958.4,1023.72 1175.88,1023.72 ; 958.95,-78.82 1175.88,-78.82 ; 1125.88,404.95 1125.88,-78.82 ; 1125.88,539.95 1125.88,1023.72 ; -78.74,1132.03 21.26,1107.03 21.26,1157.03 -78.74,1132.03 ; 944.88,1132.03 844.88,1157.03 844.88,1107.03 944.88,1132.03 ; 1125.88,-78.82 1150.88,21.18 1100.88,21.18 1125.88,-78.82 ; 1125.88,1023.72 1100.88,923.72 1150.88,923.72 1125.88,1023.72
  text "26.0mm" at 278.53,1094.53 h50
  text "28.0mm" at 970.2,434.95 h50